# EAGLE board ESP32-C3_v1.0_PCB (EAGLE 9.7.0)
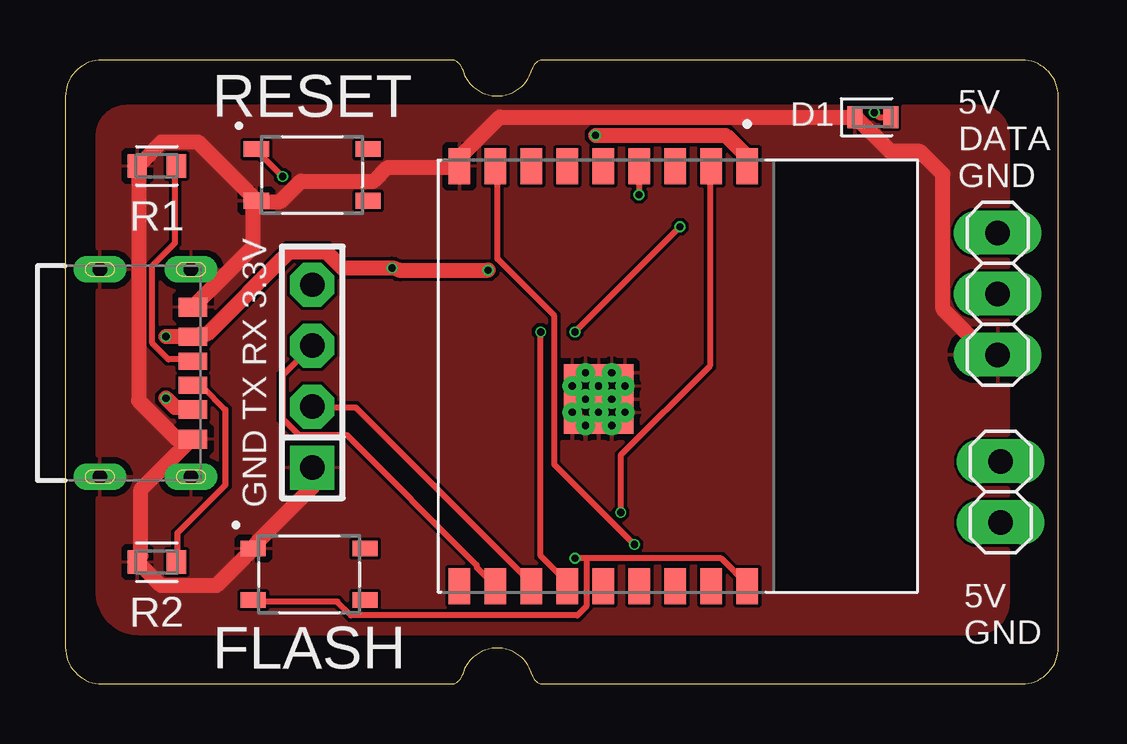
[diagram p0: board, top side]
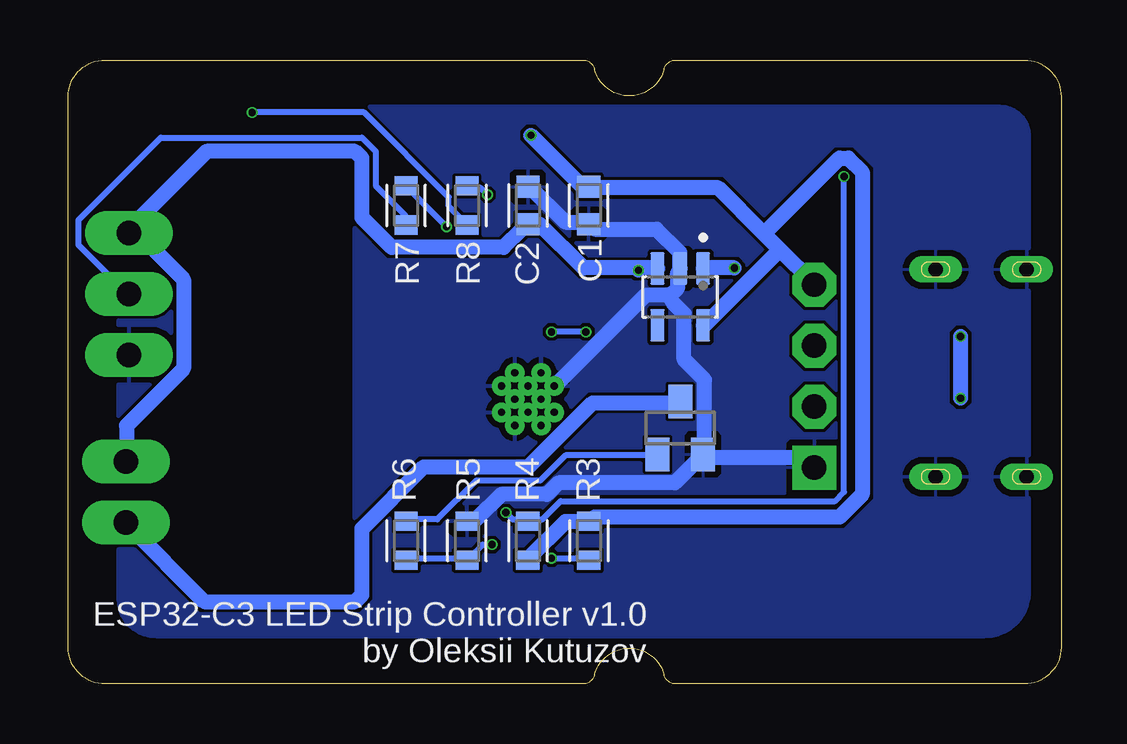
[diagram p1: board, bottom side, seen from below]

Size 41.39 x 26 mm. Coordinates in mm from the lower left corner, seen from the top.
Outline: 4.63,8.63 4.64,8.66 4.64,8.69 4.64,8.71 4.65,8.74 4.66,8.76 4.67,8.78 4.69,8.81 4.71,8.83 4.72,8.85 4.74,8.86 4.76,8.88 4.79,8.89 4.81,8.91 4.83,8.92 4.86,8.92 4.88,8.93 4.91,8.93 4.93,8.93 5.54,8.93 5.56,8.93 5.59,8.93 5.61,8.92 5.64,8.92 5.66,8.91 5.68,8.89 5.71,8.88 5.73,8.86 5.75,8.85 5.76,8.83 5.78,8.81 5.79,8.78 5.81,8.76 5.82,8.74 5.83,8.71 5.83,8.69 5.83,8.66 5.83,8.63 5.83,8.61 5.83,8.58 5.83,8.56 5.82,8.53 5.81,8.51 5.79,8.48 5.78,8.46 5.76,8.44 5.75,8.42 5.73,8.4 5.71,8.39 5.68,8.37 5.66,8.36 5.64,8.35 5.61,8.34 5.59,8.34 5.56,8.34 5.54,8.33 4.93,8.33 4.91,8.34 4.88,8.34 4.86,8.34 4.83,8.35 4.81,8.36 4.79,8.37 4.76,8.39 4.74,8.4 4.72,8.42 4.71,8.44 4.69,8.46 4.67,8.48 4.66,8.51 4.65,8.53 4.64,8.56 4.64,8.58 4.64,8.61 4.63,8.63
Outline: 0.83,17.27 0.84,17.3 0.84,17.33 0.84,17.35 0.85,17.38 0.86,17.4 0.88,17.42 0.89,17.45 0.91,17.47 0.92,17.49 0.94,17.5 0.96,17.52 0.98,17.53 1.01,17.55 1.03,17.56 1.06,17.56 1.08,17.57 1.11,17.57 1.14,17.57 1.74,17.57 1.76,17.57 1.79,17.57 1.81,17.56 1.84,17.56 1.86,17.55 1.89,17.53 1.91,17.52 1.93,17.5 1.95,17.49 1.97,17.47 1.98,17.45 2,17.42 2.01,17.4 2.02,17.38 2.02,17.35 2.03,17.33 2.03,17.3 2.04,17.27 2.03,17.25 2.03,17.22 2.02,17.2 2.02,17.17 2.01,17.15 2,17.12 1.98,17.1 1.97,17.08 1.95,17.06 1.93,17.04 1.91,17.03 1.89,17.01 1.86,17 1.84,16.99 1.81,16.98 1.79,16.98 1.76,16.98 1.74,16.97 1.14,16.97 1.11,16.98 1.08,16.98 1.06,16.98 1.03,16.99 1.01,17 0.98,17.01 0.96,17.03 0.94,17.04 0.92,17.06 0.91,17.08 0.89,17.1 0.88,17.12 0.86,17.15 0.85,17.17 0.84,17.2 0.84,17.22 0.84,17.25 0.83,17.27
Outline: 4.63,17.27 4.64,17.3 4.64,17.33 4.64,17.35 4.65,17.38 4.66,17.4 4.67,17.42 4.69,17.45 4.71,17.47 4.72,17.49 4.74,17.5 4.76,17.52 4.79,17.53 4.81,17.55 4.83,17.56 4.86,17.56 4.88,17.57 4.91,17.57 4.93,17.57 5.54,17.57 5.56,17.57 5.59,17.57 5.61,17.56 5.64,17.56 5.66,17.55 5.68,17.53 5.71,17.52 5.73,17.5 5.75,17.49 5.76,17.47 5.78,17.45 5.79,17.42 5.81,17.4 5.82,17.38 5.83,17.35 5.83,17.33 5.83,17.3 5.83,17.27 5.83,17.25 5.83,17.22 5.83,17.2 5.82,17.17 5.81,17.15 5.79,17.12 5.78,17.1 5.76,17.08 5.75,17.06 5.73,17.04 5.71,17.03 5.68,17.01 5.66,17 5.64,16.99 5.61,16.98 5.59,16.98 5.56,16.98 5.54,16.97 4.93,16.97 4.91,16.98 4.88,16.98 4.86,16.98 4.83,16.99 4.81,17 4.79,17.01 4.76,17.03 4.74,17.04 4.72,17.06 4.71,17.08 4.69,17.1 4.67,17.12 4.66,17.15 4.65,17.17 4.64,17.2 4.64,17.22 4.64,17.25 4.63,17.27
Outline: 0.83,8.63 0.84,8.66 0.84,8.69 0.84,8.71 0.85,8.74 0.86,8.76 0.88,8.78 0.89,8.81 0.91,8.83 0.92,8.85 0.94,8.86 0.96,8.88 0.98,8.89 1.01,8.91 1.03,8.92 1.06,8.92 1.08,8.93 1.11,8.93 1.14,8.93 1.74,8.93 1.76,8.93 1.79,8.93 1.81,8.92 1.84,8.92 1.86,8.91 1.89,8.89 1.91,8.88 1.93,8.86 1.95,8.85 1.97,8.83 1.98,8.81 2,8.78 2.01,8.76 2.02,8.74 2.02,8.71 2.03,8.69 2.03,8.66 2.04,8.63 2.03,8.61 2.03,8.58 2.02,8.56 2.02,8.53 2.01,8.51 2,8.48 1.98,8.46 1.97,8.44 1.95,8.42 1.93,8.4 1.91,8.39 1.89,8.37 1.86,8.36 1.84,8.35 1.81,8.34 1.79,8.34 1.76,8.34 1.74,8.33 1.14,8.33 1.11,8.34 1.08,8.34 1.06,8.34 1.03,8.35 1.01,8.36 0.98,8.37 0.96,8.39 0.94,8.4 0.92,8.42 0.91,8.44 0.89,8.46 0.88,8.48 0.86,8.51 0.85,8.53 0.84,8.56 0.84,8.58 0.84,8.61 0.83,8.63
Outline: 16.55,25.62 arc76 16.06,26 1.53,26 arc90 0,24.47 0,1.53 arc90 1.53,0 16.06,0 arc76 16.55,0.38 arc-151 19.45,0.38 arc76 19.94,0 39.86,0 arc90 41.39,1.53 41.39,24.47 arc90 39.86,26 19.94,26 arc76 19.45,25.62 arc-151 16.55,25.62
Copper layers (1*16): Top / Bottom
Stack-up Default Layer Stack: Top User Defined 0.035mm / Dielectric-1 User Defined 1.6mm / Bottom User Defined 0.035mm
Design rules "jlcpcb-2layers": minimum track width 5mil, minimum drill 0.3mm, track to track 5mil, track to pad 5mil, pad to pad 5mil, via to via 5mil, smd to smd 5mil, copper to edge 0.2mm, drill to drill 6mil, minimum pad ring 10mil, minimum via ring 3mil, stop-mask expansion 4mil, vias tented up to drill 0mil, thermal gap 10mil
Net classes: 0 default: width 0.254 mm; 1 5V: width 0.635 mm; 2 GND: width 0.635 mm

## Footprints (pad centres in the part's own frame; a part is rotated, then mirrored left to right if it is on the bottom)
CAPC1608X85 = smd 0.921 x 0.97: 1 -0.775,0; 2 0.775,0
LEDC1608X80N_FLAT-R = smd 0.612 x 0.912: A 0.75,0; C -0.75,0
GCT_USB4125-GF-A_REVA = smd 0.7 x 1.2: A5 -0.5,0.08; B5 0.5,0.08 | smd 0.76 x 1.2: A9 1.52,0.08; B9 -1.52,0.08 | smd 0.8 x 1.2: A12 2.75,0.08; B12 -2.75,0.08 | drill 0.6 pad 1.1 long: S1 -4.32,0; S2 4.32,0; S3 -4.32,-3.8; S4 4.32,-3.8
SIP-100-04-40 = drill 1.016 pad 1.778 square: 1 -3.81,0 | drill 1.016 pad 1.778 octagon: 2 -1.27,0; 3 1.27,0; 4 3.81,0
1X02 = drill 1.016 long: 1 -1.27,0; 2 1.27,0
1X03 = drill 1.016 long: 1 -2.54,0; 2 0,0; 3 2.54,0
SOT23 = smd 1 x 1.4: 1 -0.95,-1.1; 2 0.95,-1.1; 3 0,1.1
RESC1608X60 = smd 0.799 x 0.974: 1 -0.815,0; 2 0.815,0
SW_SKRPACE010 = smd 1.05 x 0.65: 1 -2.329,1.075; 2 2.329,1.075; 3 -2.329,-1.075; 4 2.329,-1.075
SOT95P285X140-5N = smd 1.35 x 0.6: 1 -1.185,0.95; 2 -1.185,0; 3 -1.185,-0.95; 4 1.185,-0.95; 5 1.185,0.95
MODULE_ESP32-C3-WROOM-02-H4 = smd 1.5 x 0.9: 1 -8.75,2.9; 2 -8.75,1.4; 3 -8.75,-0.1; 4 -8.75,-1.6; 5 -8.75,-3.1; 6 -8.75,-4.6; 7 -8.75,-6.1; 8 -8.75,-7.6; 9 -8.75,-9.1; 10 8.75,-9.1; 11 8.75,-7.6; 12 8.75,-6.1; 13 8.75,-4.6; 14 8.75,-3.1; 15 8.75,-1.6; 16 8.75,-0.1; 17 8.75,1.4; 18 8.75,2.9 | smd 0.7 x 0.7: 19 -0.14,-2.2; 20 0.96,-2.2; 21 2.06,-2.2; 22 -0.14,-3.3; 23 0.96,-3.3; 24 2.06,-3.3; 25 -0.14,-4.4; 26 0.96,-4.4; 27 2.06,-4.4 | drill 0.3 pad 0.4: 28 0.41,-2.2; 29 1.51,-2.2; 30 -0.14,-2.75; 31 0.96,-2.75; 32 2.06,-2.75; 33 0.41,-3.3; 34 1.51,-3.3; 35 -0.14,-3.85; 36 0.96,-3.85; 37 2.06,-3.85; 38 0.41,-4.4; 39 1.51,-4.4

## Placement (x,y rotation side)
C1  10uF  [CAPC1608X85]  19.68,19.94 270 bottom
C2  10uF  [CAPC1608X85]  22.23,19.94 90 bottom
D1  LED  [LEDC1608X80N_FLAT-R]  33.66,23.62 0 top
J1  USB4125-GF-A_REVA  [GCT_USB4125-GF-A_REVA]  5.24,12.95 270 top
J2  F-1X04-SIP-100-40  [SIP-100-04-40]  10.29,12.83 90 top
J3  PINHD-1X2  [1X02]  38.99,8 90 top
LED1  PINHD-1X3  [1X03]  38.86,16.26 90 top
Q1  NMOSFET  [SOT23]  15.88,10.67 0 bottom
R1  5.1k  [RESC1608X60]  3.81,21.59 180 top
R2  5.1k  [RESC1608X60]  3.81,5.08 180 top
R3  4.7K  [RESC1608X60]  19.68,5.97 90 bottom
R4  4.7K  [RESC1608X60]  22.23,5.97 90 bottom
R5  10k  [RESC1608X60]  24.77,5.97 270 bottom
R6  1k  [RESC1608X60]  27.3,5.97 270 bottom
R7  300-500 ohm  [RESC1608X60]  27.3,19.94 270 bottom
R8  430  [RESC1608X60]  24.77,19.94 90 bottom
S1  SKRPACE010  [SW_SKRPACE010]  10.16,4.57 0 top
S2  SKRPACE010  [SW_SKRPACE010]  10.29,21.21 0 top
U1  AP2112K-3.3TRG1  [SOT95P285X140-5N]  15.88,16.13 270 bottom
U2  ESP32-C3-WROOM-02-H4  [MODULE_ESP32-C3-WROOM-02-H4]  25.53,12.83 270 top

## Library data of the parts
C1 C2 = Capacitor; CATEGORY: Capacitor
D1 = LED; CATEGORY: LED; COLOR: RED; DESCRIPTION: CHIP LED FLAT; SUB-CATEGORY: CHIP; TYPE: FLAT_TOP
J1 = USB4125-GF-A_REVA model; AVAILABILITY: Warning; DESCRIPTION: USB Charge Only Connector Type C Horizontal Receptacle, 3.16mm profile, 6 Pins, Surface mount, Top mount, low cost; MF: Global Connector Technology; MP: USB4125-GF-A; PACKAGE: None; PRICE: None; PURCHASE-URL: https://pricing.snapeda.com/search/part/USB4125-GF-A/?ref=eda
J2 = con-headers-jp
J3 LED1 = Connector; CATEGORY: CONNECTOR; SUB-CATEGORY: PIN-HEADER
Q1 = Transistor; CATEGORY: Transistor; SUB-CATEGORY: MOSFET; TYPE: N-Channel
R1-R8 = Resistor; CATEGORY: Resistor; SUB-CATEGORY: Fixed
S1 S2 = SKRPACE010; MANUFACTURER: ALPS; STANDARD: Maniufacturer Recommendations
U1 = AP2112K-3.3TRG1; MANUFACTURER: Diodes Inc.; PARTREV: 2-2
U2 = ESP32-C3-WROOM-02-H4; AVAILABILITY: In Stock; DESCRIPTION: WiFi Modules (802.11) (Engineering Samples) SMD module, ESP32-C3, 4MB SPI flash, PCB antenna, -40 C +105 C; MF: Espressif Systems; MP: ESP32-C3-WROOM-02-H4; PACKAGE: None; PRICE: None; PURCHASE-URL: https://pricing.snapeda.com/search/part/ESP32-C3-WROOM-02-H4/?ref=eda

## Nets
+3.3V [5V]: C1.1 J2.4 R3.2 R4.1 U1.5 U2.1
+5V [5V]: C2.1 J1.A9 J1.B9 J3.2 LED1.3 U1.1 U1.3
CC: J1.A5 R1.1
D [GND]: J3.1 Q1.3
DATA: LED1.2 R7.2
EN: R4.2 S2.1 U2.2
ESP_RX: J2.3 U2.11
ESP_TX: J2.2 U2.12
G: Q1.1 R6.1
GND [GND]: C1.2 C2.2 D1.C J1.A12 J1.B12 J1.S1 J1.S2 J1.S3 J1.S4 J2.1 LED1.1 Q1.2 R1.2 R2.2 R5.1 S1.1 S2.3 U1.2 U2.9 U2.19 U2.20 U2.21 U2.22 U2.23 U2.24 U2.25 U2.26 U2.27 U2.28 U2.29 U2.30 U2.31 U2.32 U2.33 U2.34 U2.35 U2.36 U2.37 U2.38 U2.39
GPIO0: R3.1 S1.3 U2.18
GPIO5: R8.2 U2.4
GPIO9: R5.2 R6.2 U2.8
GPIO18: R7.1 U2.13
LED: D1.A R8.1
N$1: J1.B5 R2.1

## Tracks (layer width: path | path; a pad name or v marks a point on that pad's centre or on a via)
+3.3V  (via drill 0.3)
  Top 0.635: v22.1,22.86 27.53,22.86 28.38,22 28.38,21.62 U2.1
  Bottom 0.635: R4.1 22.19,5.24 20.67,6.76 19.72,6.76 R3.2 19.43,6.95 9.24,6.95 8.29,7.91 8.29,21.34 8.86,21.91 9.24,21.91 12.38,18.76 | 11.72,18.1 10.29,16.67 J2.4 | 11.72,18.1 12.38,18.76 | 12.38,18.76 14.29,20.67 19.62,20.67 C1.1 20,20.77 v22.1,22.86 | 11.72,18.1 14.86,14.95 U1.5
+5V  (via drill 0.3)
  Top 0.635: v4.19,11.91 4.57,11.53 5.24,11.53 J1.A9 | v4.19,14.48 5.24,14.48 J1.B9 5.62,14.57 5.91,14.57 9.34,18 10.86,18 11.53,17.34 v13.62,17.34 13.91,17.24 v17.62,17.24
  Bottom 0.635: J3.2 38.96,9.34 38.96,10.76 36.58,13.14 36.58,16.86 38.48,18.76 38.86,18.76 LED1.3 38.39,19.05 38.39,19.43 35.62,22.19 29.43,22.19 29.15,21.91 29.15,19.43 27.91,18.19 23.24,18.19 22.48,18.95 C2.1 22.19,19.14 21.72,19.14 19.91,17.34 17.62,17.34 | 17.62,17.34 16.86,17.34 U1.3 | v4.19,14.48 v4.19,11.91 | v13.62,17.34 14.86,17.34 U1.1 | v17.62,17.24 17.62,17.34
CC
  Top 0.254: R1.1 4.57,21.53 4.57,18.38 3.62,17.43 3.62,14.19 4.29,13.53 5.24,13.53 J1.A5
D
  Bottom 0.635: Q1.3 15.91,11.72 19.53,11.72 22.19,9.05 26.57,9.05 29.15,6.48 29.15,3.71 29.43,3.43 35.72,3.43 38.96,6.67 J3.1
DATA
  Bottom 0.254: R7.2 27.34,19.14 27.34,19.53 28.57,20.77 28.57,22.19 29.15,22.77 37.53,22.77 40.96,19.34 40.96,18.29 38.86,16.19 LED1.2
EN  (via drill 0.3)
  Top 0.254: v23.15,7.14 23.15,9.53 26.86,13.24 26.86,21.53 U2.2 | v9.05,21.14 8,22.19 S2.1
  Bottom 0.254: v23.15,7.14 22.86,6.86 22.29,6.86 R4.2 22.19,6.86 21.62,6.86 20.86,7.62 9.43,7.62 9.05,8 v9.05,21.14
ESP_RX
  Top 0.254: J2.3 9.05,12.86 9.05,11.05 9.72,10.38 11.72,10.38 17.14,4.95 17.14,4.86 17.91,4.1 U2.11
ESP_TX
  Top 0.254: U2.12 19.34,4.1 19.34,4.29 12.1,11.53 10.29,11.53 J2.2
G
  Bottom 0.254: R6.1 27.24,6.86 26,6.86 24.38,8.48 21.72,8.48 20.67,9.53 16.86,9.53 Q1.1
GND
  Top 0.635: U2.22 22.19,12.95 22,12.95 U2.35 21.62,12.95 21.14,12.95 U2.25 21.14,12.67 21.14,12.48 U2.38 21.14,12.19 U2.26 21.14,11.81 21.14,11.62 U2.39 21.14,11.24 21.14,10.86 U2.27 21.43,10.95 U2.37 21.72,10.76 21.91,10.76 U2.24 | U2.33 22.29,12.48 22.29,12.67 U2.22 | U2.22 22.48,12.95 U2.30 22.86,12.95 23.24,12.95 U2.19 23.34,12.67 23.34,12.48 U2.28 | U2.20 23.24,11.91 22.86,11.91 U2.31 22.57,11.91 U2.23 | U2.24 22.29,10.86 22.29,11.24 U2.34 22.29,11.62 22.29,11.81 U2.23 | U2.24 22.57,10.76 U2.32 22.86,10.76 23.24,10.76 U2.21 23.34,11.05 23.34,11.24 U2.29 | U2.36 21.72,11.91 21.91,11.91 U2.23 | J2.1 10.29,8.19 8,5.91 S1.1 7.81,5.62 6.29,4.1 4,4.1 3.05,5.05 R2.2 3.14,5.33 3.14,8.1 5.24,10.19 J1.A12 4.76,10.1 3.05,11.81 3.05,21.34 R1.2 3.05,21.62 4,22.57 5.52,22.57 7.91,20.19 S2.3 | LED1.1 38.48,13.72 36.58,15.62 36.58,21.24 35.62,22.19 34.38,22.19 32.96,23.62 D1.C 18.1,23.62 16.57,22.1 16.57,21.81 U2.9 16.38,21.53 13.43,21.53 12.86,20.95 9.81,20.95 8.95,20.1 8.29,20.1 S2.3 | J1.B12 5.33,15.72 7.81,18.19 7.81,19.91 S2.3
  Bottom 0.635: C2.2 22.19,20.77 20.67,19.24 19.72,19.24 C1.2 19.43,18.95 16.86,18.95 15.91,18 15.91,17.34 U1.2 16,17.05 16,16.48 16.29,16.19 | 16.29,16.19 17.34,16.19 21.05,12.48 U2.38 | R5.1 24.77,6.86 24.38,6.86 23.34,7.91 21.43,7.91 20.95,8.38 16.1,8.38 14.95,9.53 Q1.2 | Q1.2 14.67,9.43 10.67,9.43 10.29,9.05 J2.1 | 16.29,16.19 16.19,15.91 15.72,15.43 15.72,13.53 14.86,12.67 14.86,9.81 Q1.2
  pour Top: 2.54,24.13 38.1,24.13 arc-90 39.37,22.86 39.37,3.43 arc-90 37.97,2.03 3.05,2.03 arc-90 1.27,3.81 1.27,22.86 arc-90
  pour Bottom: 2.54,24.13 38.1,24.13 arc-90 39.37,22.86 39.37,3.56 arc-90 37.72,1.91 3.17,1.91 arc-90 1.27,3.81 1.27,22.86 arc-90
GPIO0  (via drill 0.3)
  Top 0.254: 21.72,5.24 27.34,5.24 28.48,4.1 U2.18 | 21.72,5.24 v21.24,5.24 | 21.72,5.24 21.72,3.24 21.34,2.86 11.91,2.86 11.34,3.43 7.91,3.43 S1.3
  Bottom 0.254: v21.24,5.24 19.72,5.24 R3.1
GPIO5  (via drill 0.3)
  Top 0.254: v23.91,20.38 23.91,21.53 U2.4
  Bottom 0.254: v23.91,20.38 24.19,20.67 24.77,20.67 R8.2
GPIO9  (via drill 0.3)
  Top 0.254: v23.72,5.81 20.38,9.14 20.38,15.34 18,17.72 18,21.53 U2.8
  Bottom 0.254: R6.2 27.24,5.24 24.77,5.24 R5.2 24.67,5.24 24.1,5.81 v23.72,5.81
GPIO18  (via drill 0.3)
  Top 0.254: v21.24,14.67 v25.62,19.05 | v19.81,14.67 19.81,5.33 20.86,4.29 20.86,4.1 U2.13
  Bottom 0.254: v25.62,19.05 27.24,20.67 R7.1 | v19.81,14.67 v21.24,14.67
LED  (via drill 0.3)
  Top 0.254: D1.A 33.91,23.62 v33.72,23.81
  Bottom 0.254: v33.72,23.81 29.05,23.81 25.53,20.29 25.53,19.91 24.77,19.14 R8.1
N$1
  Top 0.254: R2.1 4.67,5.14 4.67,6.29 6.67,8.29 6.67,11.43 5.71,12.38 5.33,12.38 J1.B5

## Text on the board
tNames: RESET | 5V / DATA / GND | GND TX RX 3.3V | 5V / GND | FLASH
bNames: ESP32-C3 LED Strip Controller v1.0 / by Oleksii Kutuzov